# EAGLE board Small_robot_PCB_schematic (EAGLE 7.7.0)
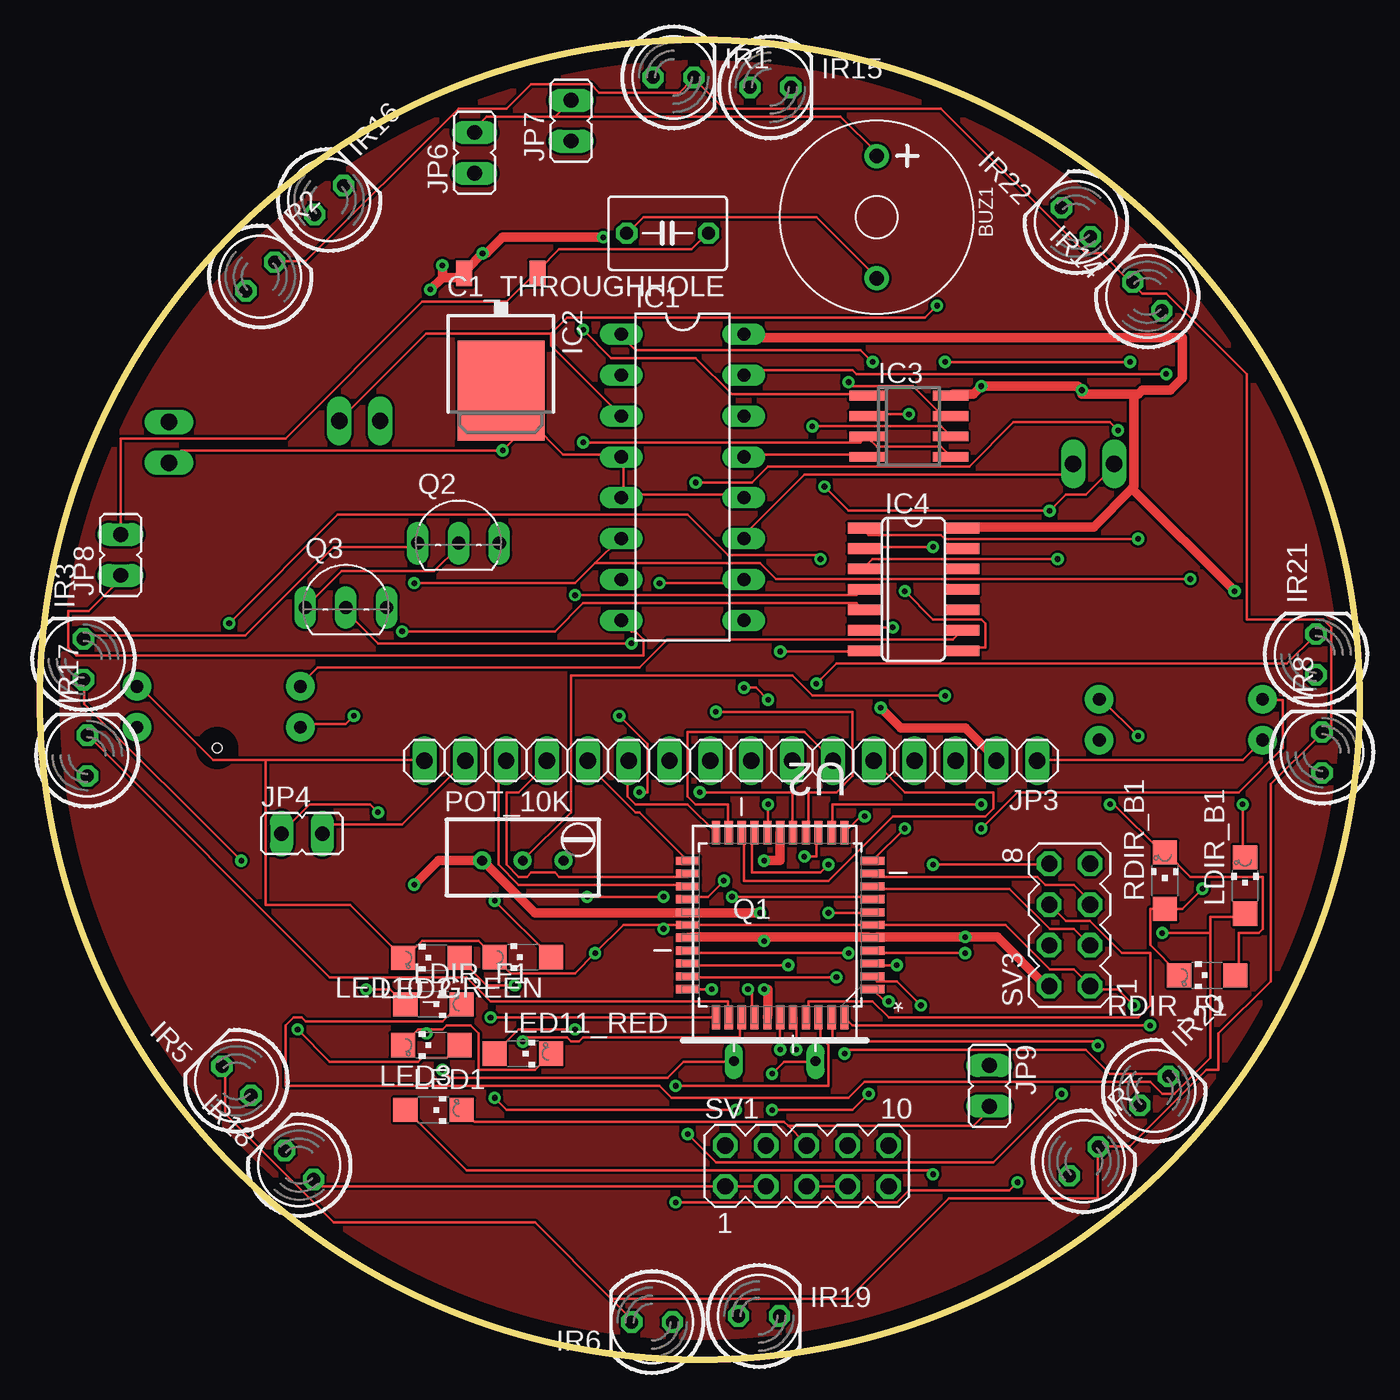
[diagram p0: board, top side]
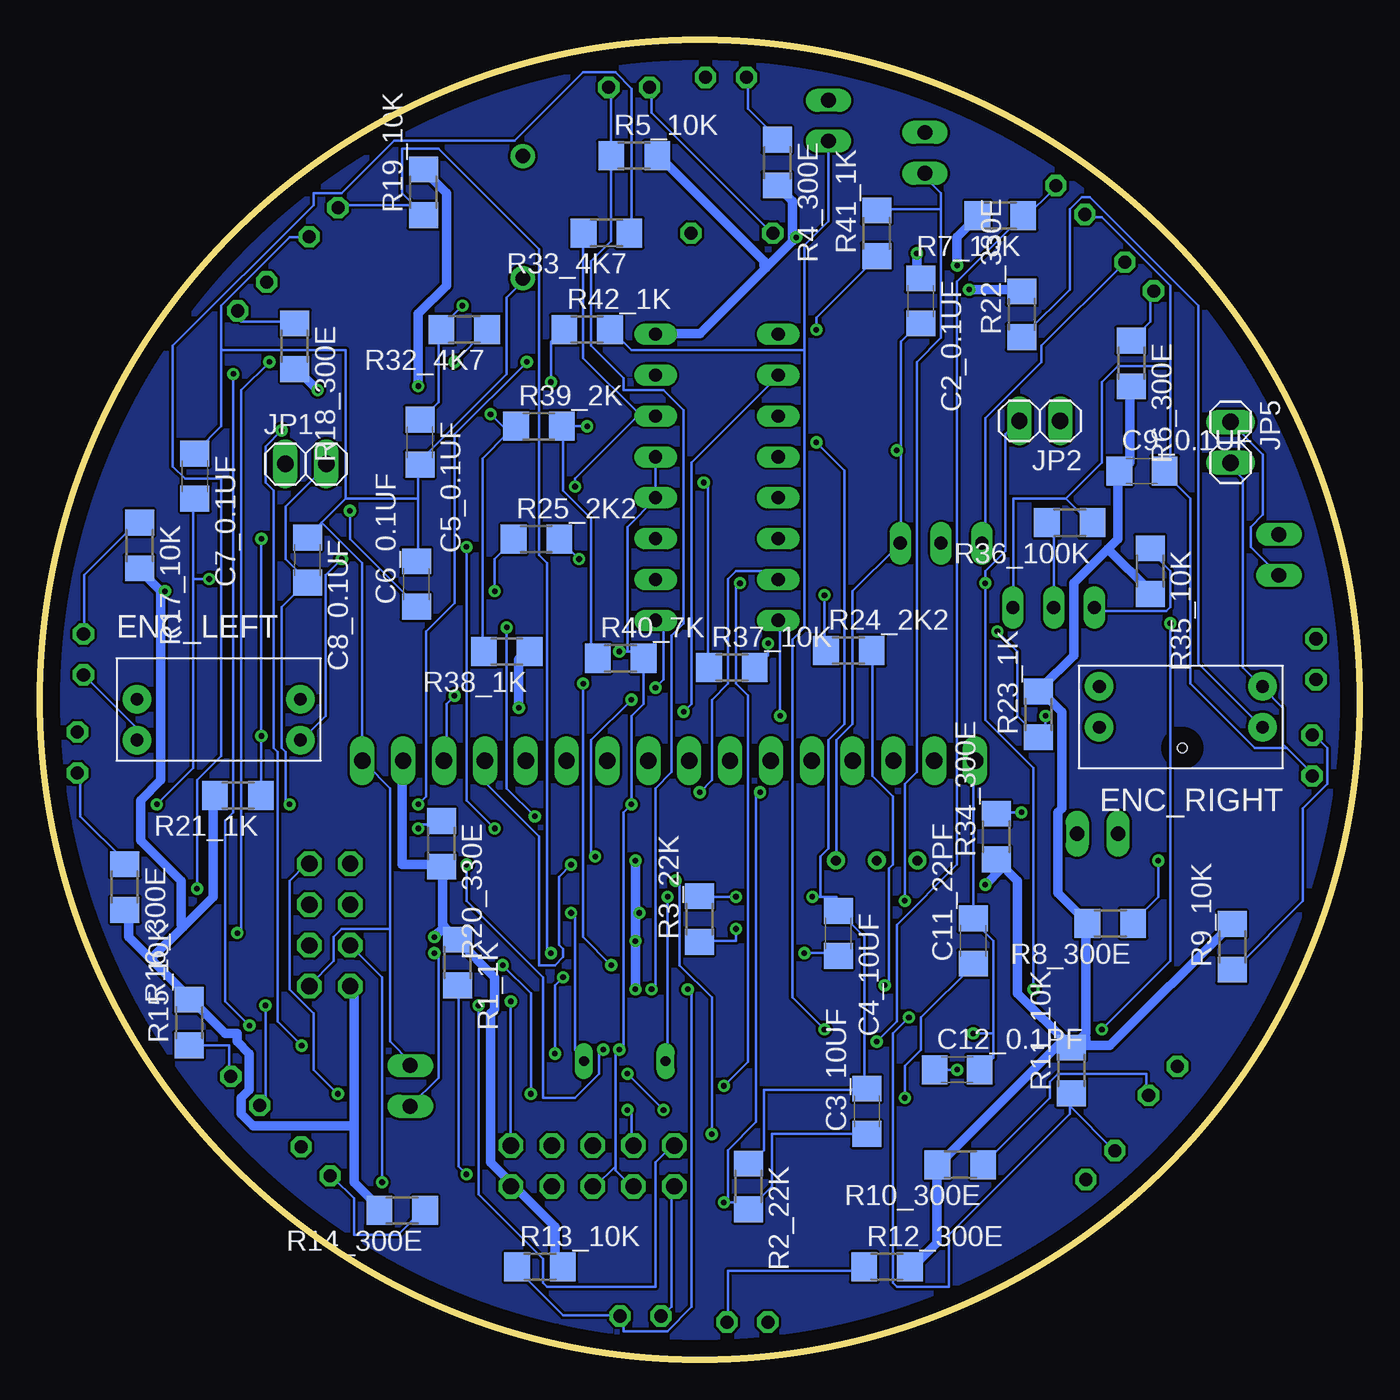
[diagram p1: board, bottom side, seen from below]

Size 82 x 82 mm. Coordinates in mm from the lower left corner, seen from the top.
Outline: circle at 41,41 radius 41
Copper layers (1*16): Top 0.035mm / dielectric 1.5mm / Bottom 0.035mm
Design rules "default *": minimum track width 6mil, minimum drill 0.35mm, track to track 6mil, track to pad 6mil, pad to pad 6mil, via to via 6mil, smd to smd 6mil, copper to edge 40mil, drill to drill 6mil, minimum pad ring 10mil, minimum via ring 8mil, stop-mask expansion 4mil, vias tented up to drill 0mil, thermal gap 10mil
Net classes: 1 vcc: width 0.584 mm
Holes 0.6 mm at 11,38

## Footprints (pad centres in the part's own frame; a part is rotated, then mirrored left to right if it is on the bottom)
BZ2-7.6-D12.0XH6.5MM = drill 0.9 pad 1.5: + -3.8,0; - 3.8,0
C050-045X075 = drill 0.813 octagon: 1 -2.54,0; 2 2.54,0
C1206 = smd 1.6 x 1.8: 1 -1.4,0; 2 1.4,0
THROUGH_HOLE_NORMAL = drill 0.8 pad 1.778: 1 -5.08,1.27; 2 -5.08,-1.27; 3 5.08,-1.27; 4 5.08,1.27
DIL16 = drill 0.813 long: 1 -8.89,-3.81; 2 -6.35,-3.81; 3 -3.81,-3.81; 4 -1.27,-3.81; 5 1.27,-3.81; 6 3.81,-3.81; 7 6.35,-3.81; 8 8.89,-3.81; 9 8.89,3.81; 10 6.35,3.81; 11 3.81,3.81; 12 1.27,3.81; 13 -1.27,3.81; 14 -3.81,3.81; 15 -6.35,3.81; 16 -8.89,3.81
TO252 = smd 1 x 1.6: 1 -2.28,-4.8; 2 2.28,-4.8 | smd 5.4 x 6.2: 3 0,2.5
SO08 = smd 0.6 x 2.2: 1 -1.905,-2.6; 2 -0.635,-2.6; 3 0.635,-2.6; 4 1.905,-2.6; 5 1.905,2.6; 6 0.635,2.6; 7 -0.635,2.6; 8 -1.905,2.6
SO14 = smd 0.66 x 2.032: 1 -3.81,-3.073; 2 -2.54,-3.073; 3 -1.27,-3.073; 4 0,-3.073; 5 1.27,-3.073; 6 2.54,-3.073; 7 3.81,-3.073; 8 3.81,3.073; 9 2.54,3.073; 10 1.27,3.073; 11 0,3.073; 12 -1.27,3.073; 13 -2.54,3.073; 14 -3.81,3.073
LED5MM = drill 0.813 octagon: A -1.27,0; K 1.27,0
1X02 = drill 1.016 long: 1 -1.27,0; 2 1.27,0
1X16 = drill 1.016 long: 1 -19.05,0; 2 -16.51,0; 3 -13.97,0; 4 -11.43,0; 5 -8.89,0; 6 -6.35,0; 7 -3.81,0; 8 -1.27,0; 9 1.27,0; 10 3.81,0; 11 6.35,0; 12 8.89,0; 13 11.43,0; 14 13.97,0; 15 16.51,0; 16 19.05,0
JP1 = drill 0.914 long: 1 0,-1.27; 2 0,1.27
CHIPLED_1206 = smd 1.5 x 1.5: A 0,-1.75; C 0,1.75
RTRIMT93YA = drill 0.61: 1 0,-2.54; 2 0,0; 3 0,2.54
Q = drill 0.61 long: 1 -2.54,-7.62; 2 2.54,-7.62
TO92-EBC = drill 0.813 long: B 0,-1.27; C -2.54,-1.27; E 2.54,-1.27
R1206 = smd 1.6 x 1.803: 1 -1.422,0; 2 1.422,0
MA05-2 = drill 1.016 octagon: 1 -5.08,-1.27; 2 -5.08,1.27; 3 -2.54,-1.27; 4 -2.54,1.27; 5 0,-1.27; 6 0,1.27; 7 2.54,-1.27; 8 2.54,1.27; 9 5.08,-1.27; 10 5.08,1.27
MA04-2 = drill 1.016 octagon: 1 -3.81,-1.27; 2 -3.81,1.27; 3 -1.27,-1.27; 4 -1.27,1.27; 5 1.27,-1.27; 6 1.27,1.27; 7 3.81,-1.27; 8 3.81,1.27
QFP80P1200X1200X120-44N = smd 1.473 x 0.508: 1 -5.74,3.988; 2 -5.74,3.2; 3 -5.74,2.388; 4 -5.74,1.6; 5 -5.74,0.787; 6 -5.74,0; 7 -5.74,-0.787; 8 -5.74,-1.6; 9 -5.74,-2.388; 10 -5.74,-3.2; 11 -5.74,-3.988; 23 5.74,-3.988; 24 5.74,-3.2; 25 5.74,-2.388; 26 5.74,-1.6; 27 5.74,-0.787; 28 5.74,0; 29 5.74,0.787; 30 5.74,1.6; 31 5.74,2.388; 32 5.74,3.2; 33 5.74,3.988 | smd 0.508 x 1.473: 12 -3.988,-5.74; 13 -3.2,-5.74; 14 -2.388,-5.74; 15 -1.6,-5.74; 16 -0.787,-5.74; 17 0,-5.74; 18 0.787,-5.74; 19 1.6,-5.74; 20 2.388,-5.74; 21 3.2,-5.74; 22 3.988,-5.74; 34 3.988,5.74; 35 3.2,5.74; 36 2.388,5.74; 37 1.6,5.74; 38 0.787,5.74; 39 0,5.74; 40 -0.787,5.74; 41 -1.6,5.74; 42 -2.388,5.74; 43 -3.2,5.74; 44 -3.988,5.74

## Placement (x,y rotation side)
BUZ1  KS-12065D03YA  [BZ2-7.6-D12.0XH6.5MM]  52,71 270 top
C1_THROUGHHOLE  1000uf  [C050-045X075]  39,70 180 top
C2_0.1UF  0.1uf  [C1206]  27.26,65.79 270 bottom
C3_10UF  10uf  [C1206]  30.61,15.42 90 bottom
C4_10UF  10uf  [C1206]  32.39,26.47 270 bottom
C5_0.1UF  0.1uf  [C1206]  58.39,57.02 270 bottom
C6_0.1UF  0.1uf  [C1206]  58.61,48.2 90 bottom
C7_0.1UF  .01uf  [C1206]  72.39,54.91 270 bottom
C8_0.1UF  0.1uf  [C1206]  65.39,49.69 270 bottom
C9_0.1UF  0.1uf  [C1206]  13.51,55.22 0 bottom
C11_22PF  22pf  [C1206]  24,26 90 bottom
C12_0.1PF  22pf  [C1206]  25,18 0 bottom
ENC_LEFT  MOC7811  [THROUGH_HOLE_NORMAL]  70.91,39.76 0 bottom
ENC_RIGHT  MOC7811  [THROUGH_HOLE_NORMAL]  11.09,40.56 180 bottom
IC1  L293D  [DIL16]  39.93,54.83 270 top
IC2  7805DT  [TO252]  28.64,62.71 180 top
IC3  LM358D  [SO08]  54,58 270 top
IC4  40106D  [SO14]  54.29,47.86 270 top
IR1  [LED5MM]  39.37,79.69 0 top
IR2  [LED5MM]  13.68,67.31 45 top
IR3  [LED5MM]  2.69,43.52 90 top
IR5  [LED5MM]  12.2,17.31 135 top
IR6  [LED5MM]  38.04,2.31 180 top
IR7  [LED5MM]  64.88,12.31 45 top
IR8  [LED5MM]  79.69,37.72 90 top
IR14  [LED5MM]  68.82,66.07 135 top
IR15  [LED5MM]  45.39,79.07 0 top
IR16  [LED5MM]  17.96,72.07 45 top
IR17  [LED5MM]  2.93,37.53 90 top
IR18  [LED5MM]  16.1,12.07 135 top
IR19  [LED5MM]  44.68,2.69 0 top
IR20  [LED5MM]  69.25,16.69 45 top
IR21  [LED5MM]  79.31,43.82 90 top
IR22  [LED5MM]  64.39,70.69 135 top
JP1  right_motor  [1X02]  65.49,55.66 0 bottom
JP2  left_motor  [1X02]  19.86,58.34 180 bottom
JP3  lcd port  [1X16]  42.93,37.22 180 top
JP4  lcd display  [JP1]  16.27,32.68 270 top
JP5  battery input  [1X02]  8,57 270 bottom
JP6  buzzer charged  [JP1]  27,75 0 top
JP7  buzzer discharged  [JP1]  33,77 0 top
JP8  battery switch  [JP1]  5,50 0 top
JP9  reset switch  [JP1]  59,17 180 top
LDIR_B1  blue  [CHIPLED_1206]  74.9,29.45 0 top
LDIR_F1  blue  [CHIPLED_1206]  24.45,22.07 270 top
LED1  white  [CHIPLED_1206]  24.45,15.5 270 top
LED2  yellow  [CHIPLED_1206]  24.31,24.96 90 top
LED3  yellow  [CHIPLED_1206]  24.31,19.53 90 top
LED10_GREEN  green  [CHIPLED_1206]  30,25 90 top
LED11_RED  red  [CHIPLED_1206]  30,19 270 top
POT_10K  10k  [RTRIMT93YA]  30,31 270 top
Q1  [Q]  45.66,26.16 0 top
Q2  BC548  [TO92-EBC]  26,52 0 top
Q3  BC548  [TO92-EBC]  19,48 0 top
R1_1K  1k  [R1206]  56.06,24.67 270 bottom
R2_22K  22k  [R1206]  37.98,10.74 270 bottom
R3_22K  22k  [R1206]  41.02,27.37 90 bottom
R4_300E  300E  [R1206]  36.18,74.39 270 bottom
R5_10K  10k  [R1206]  45.07,74.82 0 bottom
R6_300E  300E  [R1206]  14.18,61.91 270 bottom
R7_10K  10k  [R1206]  22.32,71.1 180 bottom
R8_300E  300E  [R1206]  15.48,27.1 180 bottom
R9_10K  10k  [R1206]  7.9,25.64 90 bottom
R10_300E  300E  [R1206]  24.8,12.1 180 bottom
R11_10K  10k  [R1206]  17.9,17.96 90 bottom
R12_300E  300E  [R1206]  29.36,5.74 0 bottom
R13_10K  10k  [R1206]  50.93,5.74 0 bottom
R14_300E  300E  [R1206]  59.5,9.26 180 bottom
R15_10K  10k  [R1206]  72.74,20.93 90 bottom
R16_300E  300E  [R1206]  76.74,29.36 270 bottom
R17_10K  10k  [R1206]  75.82,50.59 270 bottom
R18_300E  300E  [R1206]  66.18,62.98 270 bottom
R19_10K  10k  [R1206]  58.18,72.55 90 bottom
R20_330E  330E  [R1206]  57.06,32.05 270 bottom
R21_1K  1k  [R1206]  69.71,35.06 180 bottom
R22_330E  330E  [R1206]  20.98,64.96 90 bottom
R23_1K  1k  [R1206]  19.94,40.09 90 bottom
R24_2K2  2k2  [R1206]  31.74,44.06 0 bottom
R25_2K2  2k2  [R1206]  51.15,50.98 0 bottom
R32_4K7  4k7  [R1206]  55.64,64.02 180 bottom
R33_4K7  4k7  [R1206]  46.8,70.02 180 bottom
R34_300E  300E  [R1206]  22.57,32.49 90 bottom
R35_10K  10k  [R1206]  13,49 270 bottom
R36_100K  100k  [R1206]  18,52 180 bottom
R37_10K  10k  [R1206]  39,43 0 bottom
R38_1K  1k  [R1206]  53,44 180 bottom
R39_2K  2k  [R1206]  51,58 0 bottom
R40_7K  7k  [R1206]  45.92,43.58 0 bottom
R41_1K  1k  [R1206]  30,70 90 bottom
R42_1K  1k  [R1206]  48,64 0 bottom
RDIR_B1  blue  [CHIPLED_1206]  69.91,29.75 0 top
RDIR_F1  blue  [CHIPLED_1206]  72.55,23.87 90 top
SV1  isp programming  [MA05-2]  47.66,12.02 0 top
SV3  extender  [MA04-2]  64,27 90 top
U2  ATMEGA16-16AU  [QFP80P1200X1200X120-44N]  46,27 180 top

## Library data of the parts
BUZ1 = Seeed-OPL-Connector; MPN: KS-12065D03YA
C1_THROUGHHOLE C2_0.1UF C9_0.1UF C11_22PF C12_0.1PF POT_10K R1_1K R2_22K R3_22K R4_300E R5_10K R6_300E R7_10K R8_300E R9_10K R10_300E R11_10K R12_300E R13_10K R14_300E R15_10K R16_300E R17_10K R18_300E R19_10K R20_330E R21_1K R22_330E R23_1K R24_2K2 R25_2K2 R32_4K7 R33_4K7 R34_300E R35_10K R36_100K R37_10K R38_1K R39_2K R40_7K R41_1K R42_1K = resistor
C3_10UF C4_10UF C5_0.1UF C6_0.1UF C7_0.1UF C8_0.1UF = rcl
ENC_LEFT ENC_RIGHT = Motor encoder MOC7811
IC1 = st-microelectronics; MPN: L293D; OC_FARNELL: 9589619; OC_NEWARK: 56P8249
IC2 IC3 = linear
IC4 = 40xx
IR1-IR3 IR5-IR8 IR14-IR22 LDIR_B1 LDIR_F1 LED1-LED3 LED10_GREEN LED11_RED RDIR_B1 RDIR_F1 = led
JP1-JP3 JP5 = pinhead
JP4 JP6-JP9 = jumper
Q1 = special
Q2 Q3 = transistor-npn
SV1 SV3 = con-lstb; OC_FARNELL: unknown; OC_NEWARK: unknown
U2 = Atmel_By_element14_Batch_1-00; DESCRIPTION: 8-bit Microcontroller; MPN: ATMEGA16-16AU; OC_FARNELL: 9171134; OC_NEWARK: 96K6515; PACKAGE: QFP-44; SUPPLIER: Atmel

## Nets
3.5V: IC3.6 R39_2K.2 R40_7K.1
4.5V: IC3.2 R38_1K.2 R39_2K.1
ADC_VOL: C3_10UF.2 C4_10UF.1 IC3.3 IC3.5 R2_22K.1 R3_22K.2
D4: JP3.11 U2.22
D5: JP3.12 U2.23
D6: JP3.13 U2.24
D7: JP3.14 U2.25
DISCHARGED: IC3.7 R42_1K.1
EN: JP3.6 U2.21
EN_LEFT: IC4.2 U2.11
EN_RIGHT: IC4.6 U2.12
GND: BUZ1.- C1_THROUGHHOLE.2 C2_0.1UF.2 C4_10UF.2 C5_0.1UF.2 C6_0.1UF.2 C7_0.1UF.1 C8_0.1UF.1 C9_0.1UF.2 C11_22PF.2 C12_0.1PF.2 ENC_LEFT.2 ENC_RIGHT.2 IC1.4 IC1.5 IC1.12 IC1.13 IC2.3 IC3.4 IC4.7 IR15.A IR16.A IR17.A IR18.A IR19.A IR20.A IR21.A IR22.A JP3.1 JP3.16 JP5.2 JP9.1 LED2.C LED3.C LED10_GREEN.C LED11_RED.C POT_10K.3 Q2.E Q3.E R3_22K.1 R36_100K.1 R40_7K.2 SV1.1 SV1.3 SV1.5 SV1.7 SV3.1 U2.6 U2.18 U2.28 U2.39
IN1L: IC1.2 U2.15
IN1R: IC1.10 U2.42
IN2L: IC1.7 U2.16
IN2R: IC1.15 U2.44
IR1: IR15.K R5_10K.1 U2.37
IR2: IR16.K R7_10K.1 U2.36
IR3: IR17.K R9_10K.1 U2.35
IR4: IR18.K R11_10K.1 U2.34
IR5: IR19.K R13_10K.1 U2.33
IR6: IR20.K R15_10K.1 U2.32
IR7: IR21.K R17_10K.1 U2.31
IR8: IR22.K R19_10K.1 U2.30
IR_PROXIMITY: IR1.K IR2.K IR3.K IR5.K IR6.K IR7.K IR8.K IR14.K Q2.C
IR_SW: R37_10K.1 U2.43
MISO: SV1.2 U2.2
MOSI: SV1.10 U2.1
N: JP3.3 POT_10K.2
N$1: ENC_LEFT.1 R20_330E.1
N$2: C12_0.1PF.1 Q1.1 U2.8
N$3: C11_22PF.1 Q1.2 U2.7
N$4: IR1.A R4_300E.1
N$5: IR2.A R6_300E.1
N$6: IR3.A R8_300E.1
N$7: IR5.A R10_300E.1
N$8: LED1.A R1_1K.2
N$9: IR6.A R12_300E.1
N$10: IR7.A R14_300E.1
N$11: IR8.A R16_300E.1
N$12: IR14.A R18_300E.1
N$13: Q3.B R36_100K.2 R37_10K.2
N$14: C1_THROUGHHOLE.1 IC2.1 JP8.2
N$15: IC4.4 R24_2K2.1
N$16: LED2.A R24_2K2.2
N$17: IC4.8 R25_2K2.1
N$18: LED3.A R25_2K2.2
N$19: ENC_RIGHT.1 R22_330E.1
N$20: JP6.1 LED10_GREEN.A R41_1K.2
N$23: ENC_RIGHT.4 IC4.5 R23_1K.1
N$27: Q2.B Q3.C R35_10K.1
N$28: R33_4K7.1 RDIR_B1.A RDIR_F1.C
N$29: ENC_LEFT.4 IC4.1 R21_1K.1
N$30: ENC_LEFT.3 IC4.3
N$31: ENC_RIGHT.3 IC4.9
N$32: JP7.1 LED11_RED.A R42_1K.2
N$33: BUZ1.+ JP6.2 JP7.2
N$34: IC3.1 R41_1K.1
N$35: LDIR_B1.A LDIR_F1.C R32_4K7.1
N$39: JP3.15 JP4.2
N$49: JP4.1 R34_300E.2
OUT1L: C5_0.1UF.1 IC1.3 JP2.1 R32_4K7.2
OUT1R: C6_0.1UF.1 IC1.14 JP1.1 R33_4K7.2
OUT2L: C7_0.1UF.2 IC1.6 JP2.2 LDIR_B1.C LDIR_F1.A
OUT2R: C8_0.1UF.2 IC1.11 JP1.2 RDIR_B1.C RDIR_F1.A
PIN_26: SV3.7 U2.26
PIN_40: SV3.8 U2.40
PIN_41: SV3.6 U2.41
PWML: IC1.1 U2.13
PWMR: IC1.9 U2.14
RESET: JP9.2 LED1.C SV1.6 U2.4
RS: JP3.4 U2.19
RW: JP3.5 U2.20
RXD: SV3.3 U2.9
SCK: SV1.4 U2.3
TXD: SV3.5 U2.10
V_BATT: C3_10UF.1 IC1.8 JP5.1 JP8.1 R2_22K.2 SV3.4
VCC [vcc]: C2_0.1UF.1 C9_0.1UF.1 IC1.16 IC2.2 IC3.8 IC4.14 JP3.2 POT_10K.1 R1_1K.1 R4_300E.2 R5_10K.2 R6_300E.2 R7_10K.2 R8_300E.2 R9_10K.2 R10_300E.2 R11_10K.2 R12_300E.2 R13_10K.2 R14_300E.2 R15_10K.2 R16_300E.2 R17_10K.2 R18_300E.2 R19_10K.2 R20_330E.2 R21_1K.2 R22_330E.2 R23_1K.2 R34_300E.1 R35_10K.2 R38_1K.1 SV1.9 SV3.2 U2.5 U2.17 U2.27 U2.29 U2.38

## Tracks (layer width: path | path; a pad name or v marks a point on that pad's centre or on a via)
3.5V  (via drill 0.35)
  Top 0.152: v48,58 56,58 56.5,57.5 IC3.6
  Bottom 0.152: 49.5,58 49.5,54 47.75,52.25 47.75,44 47.5,43.75 R40_7K.1 | 49.5,58 v48,58 | 49.5,58 R39_2K.2
4.5V  (via drill 0.35)
  Top 0.152: v54,58.75 51.5,58.75 IC3.2
  Bottom 0.152: 53,57.5 52.5,58 R39_2K.1 53,57.5 | 53,57.5 54.5,56 54.5,44 R38_1K.2 | v54,58.75 53,57.75 53,57.5
ADC_VOL  (via drill 0.35)
  Top 0.152: IC3.5 56.5,56.25 56,56.75 52,56.75 51.5,57.25 IC3.3 51.25,57.25 51,57 v33.75,57 | v34,28.75 v38.75,28.75
  Bottom 0.152: R2_22K.1 37.75,12.25 37,13 37,16.75 30.75,16.75 C3_10UF.2 30.75,17 30.75,26.25 32.25,27.75 C4_10UF.1 32.5,28 32.5,28.75 33.5,28.75 | v38.75,28.75 41,28.75 R3_22K.2 | 33.5,28.75 v34,28.75 | v33.75,57 32,55.25 32,39.5 33,38.5 33,31.75 33.5,31.25 33.5,28.75
D4
  Top 0.152: U2.22 40.25,34.5 37,34.5 36.5,35 36.5,37 JP3.11
D5
  Top 0.152: U2.23 37.25,34 37,34 34,37 JP3.12
D6
  Top 0.152: U2.24 40.25,30 32.25,30 32,30.25 30.5,30.25 30.25,30 29.75,30 29,30.75 29,35.25 29.75,35.25 31.5,37 JP3.13
D7
  Top 0.152: U2.25 40.25,29.5 29.75,29.5 28.5,30.75 28.5,37 28.75,37 JP3.14
DISCHARGED  (via drill 0.35)
  Top 0.152: v50.25,60.75 50.5,60.5 54.25,60.5 56,58.75 56.5,58.75 IC3.7
  Bottom 0.152: v50.25,60.75 50.25,63.25 49.5,64 R42_1K.1
EN
  Top 0.152: JP3.6 47.5,39 40.25,39 40.25,35 40.75,34.5 42.75,34.5 42.75,32.75 U2.21
EN_LEFT  (via drill 0.35)
  Top 0.152: v53.75,33 U2.11 | v55.5,50.5 51.25,50.5 IC4.2
  Bottom 0.152: v53.75,33 55.5,34.75 v55.5,50.5
EN_RIGHT  (via drill 0.35)
  Top 0.152: v51.25,33.75 51,33.75 U2.12 | v53,45.5 51.25,45.5 IC4.6
  Bottom 0.152: v51.25,33.75 53,35.5 v53,45.5
GND  (via drill 0.35)
  Top 0.152: 24,20.5 25,20.5 25.25,20.75 26.75,20.75 27.25,20.25 27.25,18 30.75,18 LED11_RED.C | 24,20.5 23.5,20.5 22.75,19.75 LED3.C | v24,20.25 24,20.5 | 14,37.25 23.75,37.25 JP3.16 | 14,37.25 10.75,37.25 6.25,41.75 ENC_RIGHT.2 | v46,19.25 U2.39 | SV1.5 SV1.7 | IR18.A 17,11 17.25,10.75 SV1.1 SV1.3 | v45.25,34.5 45.25,32.75 U2.18 | v46,44 51,44 IC4.7 | 36.25,53.75 36.25,56 IC1.4 36,56.25 32.5,56.25 30.5,58.25 | IC3.4 51.25,56.25 43.75,56.25 IC1.13 | 36.25,53.75 43.5,53.75 IC1.12 | 36.25,53.75 IC1.5 | 30.5,58.25 28.75,60 IC2.3 30.5,58.25 | 30.5,58.25 v28.75,56.5 8.75,56.5 8,55.75 JP5.2 | C1_THROUGHHOLE.2 36.5,70 37.5,71 48.25,71 52,67.25 BUZ1.- | 38.75,27 U2.28 U2.6 60,27 62.75,24.25 64.25,24.25 65.25,23.25 SV3.1 65.5,23 67,23 v68,22 | 38.75,27 36.25,27 v34.5,25.25 33.25,24 29.25,24 LED10_GREEN.C 27.25,26 23.75,26 22.75,25 LED2.C 22.5,25 19.25,28.25 14,28.25 14,37.25 | 38.75,27 v38.75,26.75 | ENC_LEFT.2 74.75,37.25 62,37.25 JP3.1
  Bottom 0.152: 18.25,53.5 16.75,52 R36_100K.1 | 18.25,53.5 21.5,53.5 21.5,46.75 Q3.E | 11.75,61.75 11.75,66.75 16,71 17,71 IR16.A | 11.75,61.75 11.75,55.5 12,55.25 C9_0.1UF.2 12,55 10.5,53.5 10.5,42 6.5,38 4.5,38 | 18.25,53.5 16,55.75 16,60.75 15,61.75 11.75,61.75 | 4.5,38 4.75,38.25 4.75,40.5 6,41.75 ENC_RIGHT.2 6.25,42 7.25,43 7.25,54.75 8,55.5 JP5.2 | 4.5,38 3,36.5 IR17.A | 22.75,20.25 22.75,26 24,27.25 C11_22PF.2 24,37 JP3.16 | 22.75,20.25 22.75,18.75 23.5,18 C12_0.1PF.2 | 22.75,20.25 v24,20.25 | 46.25,12 46.25,11.75 45.25,10.75 SV1.3 | 46.25,12 46.25,19 v46,19.25 45.75,19.5 45.75,34 v45.25,34.5 45.25,40 44.5,40.75 44.5,43.5 R40_7K.2 44.5,43.75 44.5,44 45.5,44 | 46.25,12 47.5,10.75 SV1.5 | IR19.A 43.25,2.75 42.75,3.25 42.75,10.75 SV1.1 | 28.5,56.5 28.5,50.75 Q2.E 28.75,50.5 31.5,47.75 31.5,39.5 32.5,38.5 32.5,31 POT_10K.3 | 28.5,56.5 28.5,63.25 27.5,64.25 C2_0.1UF.2 | 45.5,44 v46,44 | IC1.13 43.75,56 43.75,53.75 IC1.12 43.75,53.5 45.5,51.75 45.5,44 | v28.75,56.5 28.5,56.5 | 70.75,62.75 70.75,65.5 66.5,69.75 65.5,69.75 IR22.A | 70.75,62.75 70.75,58 72.25,56.5 C7_0.1UF.1 | C1_THROUGHHOLE.2 36.5,70 44,77.5 44,79 IR15.A | 58.5,53.5 58.5,49.75 C6_0.1UF.2 | 58.5,53.5 58.5,55.5 C5_0.1UF.2 58.25,55.75 58.25,56 53,61.25 53,66 52,67 BUZ1.- | 63,53.5 64.5,52 | 64.5,52 65.25,51.25 C8_0.1UF.1 | 58.5,53.5 63,53.5 | 70.75,62.75 63,62.75 63,53.5 | v34.5,25.25 32.5,25.25 C4_10UF.2 | v38.75,26.75 38.75,26 41,26 R3_22K.1 | v68,22 68,16.25 68.25,16 IR20.A | IR21.A 79.25,42.5 76,39.25 ENC_LEFT.2 | 60.25,26.75 60.25,35.5 61.75,37 JP3.1 62,37.25 62,49.5 64.5,52 | 60.25,26.75 60.25,19.75 59,18.5 JP9.1 | 60.25,26.75 63.25,26.75 63.75,26.25 63.75,24.75 65.25,23.25 SV3.1
IN1L  (via drill 0.35)
  Top 0.152: v42,40.25 50.5,40.25 50.5,36.25 49.5,35.25 47.75,35.25 47.75,32.75 U2.15
  Bottom 0.152: v42,40.25 41.5,40.75 41.5,55.75 36.25,61 IC1.2
IN1R  (via drill 0.35)
  Top 0.152: v39.5,17 49,17 49,19.5 48.5,20 48.5,21.25 U2.42 | v38.5,48.25 43.5,48.25 IC1.10
  Bottom 0.152: v39.5,17 38,18.5 38,41.25 38.75,42 38.75,48 v38.5,48.25
IN2L  (via drill 0.35)
  Top 0.152: v41,35.25 46.75,35.25 46.75,32.75 U2.16
  Bottom 0.152: v41,35.25 40.25,36 40.25,41 39.25,42 39.25,48.5 38.75,49 36.25,49 36.25,48.5 IC1.7
IN2R  (via drill 0.35)
  Top 0.152: v69,20.75 50.5,20.75 U2.44 | v70,61.25 50.75,61.25 50.5,61.5 44,61.5 43.75,61.25 IC1.15
  Bottom 0.152: v69,20.75 70.5,22.25 70.5,33.5 70,34 v70,61.25
IR1  (via drill 0.35)
  Top 0.152: v44,23 44.25,23 44.25,21.5 U2.37
  Bottom 0.152: v44,23 43.75,23.25 43.75,35.5 42.75,36.5 42.75,45 42,45.75 42,59 43.25,60.25 45.75,60.25 45.75,61 47.75,63 47.75,68.25 46.5,69.5 46.5,74.75 R5_10K.1 46.5,75 46.5,79 IR15.K
IR2  (via drill 0.35)
  Top 0.152: v30,19.75 30.25,20 32.75,20 33,19.75 33.5,19.75 33.75,20 43.5,20 43.5,21.25 U2.36
  Bottom 0.152: v30,19.75 28.75,21 28.75,27 25,30.75 25,67 21,71 R7_10K.1 20.75,71 19,72.75 IR16.K
IR3
  Top 0.152: U2.35 42.75,21.5 42.75,22.25 28,22.25 26.5,23.75 18,23.75 3,38.75 IR17.K
  Bottom 0.152: R9_10K.1 7.75,24.25 3.5,28.5 3.5,34.25 2,35.75 2,38 2.75,38.75 IR17.K
IR4  (via drill 0.35)
  Top 0.152: v28,21.25 U2.34
  Bottom 0.152: v28,21.25 29,20.25 29,4.75 28.75,4.5 25.5,4.5 25.5,7.75 18,15.25 18,15.75 | 18,15.75 18,16.5 R11_10K.1 18,15.75 | 18,15.75 15.25,13 IR18.K
IR5  (via drill 0.35)
  Top 0.152: v41.75,23 40.5,23 U2.33
  Bottom 0.152: v41.75,23 41.5,22.75 41.5,3.25 43,1.75 45.75,1.75 45.75,2.5 IR19.K 46,2.75 49.5,2.75 52.25,5.5 R13_10K.1
IR6  (via drill 0.35)
  Top 0.152: v49.5,23.75 40.5,23.75 U2.32 | v50,19 50.25,19.25 65,19.25 66.5,17.75 70,17.75 IR20.K
  Bottom 0.152: v49.5,23.75 50,23.25 v50,19 | R15_10K.1 72.5,19.5 70.25,19.5 70.25,17.75 IR20.K
IR7  (via drill 0.35)
  Top 0.152: v46.5,24.5 40.5,24.5 U2.31 | v48.25,42 49.5,43.25 77.5,43.25 79.25,45 IR21.K
  Bottom 0.152: v46.5,24.5 48.25,26.25 v48.25,42 | R17_10K.1 76,52 79.25,48.75 79.25,45.25 IR21.K
IR8  (via drill 0.35)
  Top 0.152: v50.25,25.25 40.5,25.25 U2.30
  Bottom 0.152: v50.25,25.25 50.5,25.5 50.5,49.5 51,50 51,69 57.25,75.25 59.5,75.25 59.5,72.5 58.75,71.75 | 58.75,71.75 58.25,71.25 R19_10K.1 58.75,71.75 | 58.75,71.75 63.25,71.75 IR22.K
IR_PROXIMITY
  Top 0.152: IR3.K 2.75,45 12.75,45 18.25,50.5 23.25,50.5 Q2.C | IR2.K 14.75,68.25 16.5,68.25 26,77.75 29,77.75 30.5,79.25 34.25,79.25 34.75,78.75 39.75,78.75 40.5,79.5 IR1.K 40.75,79.5 42.5,77.75 56,77.75 65,68.75 66,68.75 67.75,67 IR14.K 68,66.75 68.5,66.25 70,66.25 75,61.25 75,46 79.75,46 80.25,45.5 80.25,39 79.75,39 IR8.K 79.5,38.75 76.5,35.75 76.5,23.5 73.25,20.25 73.25,18 72.5,18 67.75,13.25 66,13.25 IR7.K 65.75,13 65.75,10 56.5,10 50.25,3.75 35.5,3.75 | 35.5,3.75 30.75,8.5 18.25,8.5 11.5,15.25 11.5,18 IR5.K | 35.5,3.75 36.75,2.5 IR6.K
  Bottom 0.152: IR2.K 14.75,68 19.75,63 19.75,62 23.25,58.5 23.25,50.75 Q2.C
IR_SW  (via drill 0.35)
  Top 0.152: v65.75,19.5 65.5,19.75 49.25,19.75 49.25,21.25 U2.43 | v67,57.75 66.5,58.25 60.5,58.25 57.75,55.5 45.25,55.5 44.25,54.5 v40.75,54.5
  Bottom 0.152: v65.75,19.5 67.25,21 67.25,37.75 67.5,38 67.5,54 68,54.5 68,56.75 v67,57.75 | v40.75,54.5 40.5,54.25 40.5,43 R37_10K.1
MISO  (via drill 0.35)
  Top 0.152: v54.75,22 53.25,23.5 52,23.5 51.75,23.75 U2.2
  Bottom 0.152: v54.75,22 54.75,10.25 50.75,6.25 50.75,4.75 50.5,4.5 43.75,4.5 43.75,12.25 42.75,13.25 SV1.2
MOSI  (via drill 0.35)
  Top 0.152: v52.75,22.25 52.5,22.25 U2.1
  Bottom 0.152: v52.75,22.25 52.75,13.5 SV1.10
N  (via drill 0.35)
  Top 0.152: POT_10K.2 33,34 33,42.5 46.75,42.5 48,41.25 v56.25,41.25
  Bottom 0.152: v56.25,41.25 56.75,40.75 56.75,37.25 JP3.3
N$1  (via drill 0.35)
  Top 0.152: v58.5,33 60.75,35.25 74.5,35.25 77.25,38 77.25,41 76,41 ENC_LEFT.1
  Bottom 0.152: v58.5,33 58.5,33.25 57.25,33.25 R20_330E.1
N$2  (via drill 0.35)
  Top 0.152: v43,28.75 51.5,28.75 U2.8 | v25,18 25.5,17.5 39,17.5 40,18.5 43,18.5 Q1.1
  Bottom 0.152: v43,28.75 43,18.75 Q1.1 | v25,18 C12_0.1PF.1
N$3  (via drill 0.35)
  Top 0.152: v49,27.75 51.5,27.75 U2.7 | v28.25,16.25 29,15.5 v43.25,15.5 | v45.5,17.75 46.25,18.5 48,18.5 Q1.2
  Bottom 0.152: v49,27.75 48.75,27.5 48.75,19.25 48.25,18.75 Q1.2 | v28.25,16.25 28.25,18.25 27.25,19.25 27.25,21.25 24,24.5 C11_22PF.1 | v45.5,17.75 v43.25,15.5
N$4
  Bottom 0.152: R4_300E.1 36.25,76 38,77.75 38,79.5 IR1.A
N$5
  Bottom 0.152: R6_300E.1 14,63.5 13,64.5 13,66.25 IR2.A
N$6  (via drill 0.35)
  Top 0.152: v12.5,31 2.75,40.75 2.75,42.25 IR3.A
  Bottom 0.152: v12.5,31 12.5,28.75 14,27.25 R8_300E.1
N$7
  Bottom 0.152: R10_300E.1 23.25,12.25 19.25,16.25 19.25,17.25 18.75,17.75 13.25,17.75 13.25,16.5 IR5.A
N$8  (via drill 0.35)
  Top 0.152: v55.5,11.5 55.25,11.75 26.5,11.75 22.75,15.5 LED1.A
  Bottom 0.152: v55.5,11.5 56,12 56,23 R1_1K.2
N$9
  Bottom 0.152: R12_300E.1 31,5.5 39.25,5.5 39.25,2.5 IR6.A
N$10
  Bottom 0.152: R14_300E.1 58.25,9.25 59.75,7.75 62.5,7.75 62.5,10 63.75,11.25 IR7.A
N$11
  Bottom 0.152: R16_300E.1 76.75,31 79.5,33.75 79.5,36.25 IR8.A
N$12
  Bottom 0.152: R18_300E.1 66.25,64.5 69.5,64.5 69.5,65 IR14.A
N$13  (via drill 0.35)
  Top 0.152: v36.75,44.5 21,44.5 19,46.5 Q3.B
  Bottom 0.152: Q3.B 19,51.75 19.25,52 R36_100K.2 | v36.75,44.5 36.75,43.75 37.5,43 R37_10K.2
N$14
  Top 0.152: C1_THROUGHHOLE.1 41.5,70 40.5,69 32.25,69 31,67.75 IC2.1 30.75,67.5 29,65.75 23.75,65.75 15.25,57.25 5,57.25 JP8.2
N$15  (via drill 0.35)
  Top 0.152: v33.25,47.5 50.75,47.5 51,47.75 IC4.4
  Bottom 0.152: v33.25,47.5 33.25,44.25 R24_2K2.1
N$16  (via drill 0.35)
  Top 0.152: v29.5,23.25 27.75,23.25 26.25,24.75 LED2.A
  Bottom 0.152: v29.5,23.25 29.25,23.5 29.25,30.5 29,30.75 29,35 30.25,36.25 30.25,44 R24_2K2.2
N$17  (via drill 0.35)
  Top 0.152: v53.75,47.75 55.5,46 58.5,46 58.75,45.75 58.75,44.25 57.5,44.25 IC4.8
  Bottom 0.152: v53.75,47.75 53.75,49.75 52.75,50.75 R25_2K2.1
N$18  (via drill 0.35)
  Top 0.152: v16,20.5 18,18.5 23.5,18.5 23.75,18.75 25.25,18.75 26,19.5 LED3.A | v11.75,45.75 18.5,52.5 40.25,52.5 42.75,50 48.25,50 v48.5,49.75
  Bottom 0.152: v16,20.5 11.75,24.75 v11.75,45.75 | v48.5,49.75 49.5,50.75 R25_2K2.2
N$19
  Bottom 0.152: R22_330E.1 20.75,63.75 18,66.5 18,71.5 17.25,72.25 16.75,72.25 10,65.5 10,43.25 6.25,39.5 ENC_RIGHT.1
N$20  (via drill 0.35)
  Top 0.152: v28.25,28.5 LED10_GREEN.A
  Bottom 0.152: v28.25,28.5 28.25,35.75 27.5,36.5 27.5,62 26,63.5 26,71.5 | 26,71.5 26,72.5 27,73.5 JP6.1 | 26,71.5 30,71.5 R41_1K.2
N$21
  pour Bottom: 39,82 arc-180 42,0 arc-180
  pour Top: 39,82 arc-180 42,0 arc-180
N$23  (via drill 0.35)
  Top 0.152: v19.5,40 19,39.5 16.25,39.5 ENC_RIGHT.4 | v22.5,45.25 32,45.25 33.75,47 50.75,47 51,46.75 IC4.5
  Bottom 0.152: v19.5,40 19.5,39 19.75,38.75 R23_1K.1 20,38.75 21.25,40 21.25,44 v22.5,45.25
N$27
  Top 0.152: Q2.B 26,50.5 24.5,49 18.75,49 16.5,46.75 Q3.C
  Bottom 0.152: R35_10K.1 13,50.25 11.75,49 11.75,46.75 12,46.5 16.25,46.5 Q3.C
N$28  (via drill 0.35)
  Top 0.152: RDIR_F1.C 70.75,24 69,25.75 69,28 RDIR_B1.A 71,28 v72.25,29.25
  Bottom 0.152: v72.25,29.25 72.25,36 70.75,37.5 70.75,54.75 73,54.75 73.75,55.5 73.75,63 65,71.75 65,72.5 63.25,72.5 60,75.75 52.5,75.75 48.25,80 46.25,80 45.25,79 45.25,70.25 R33_4K7.1
N$29  (via drill 0.35)
  Top 0.152: v68.25,38.75 66,41 ENC_LEFT.4 | v68.25,51 56.25,51 56,51.25 51.5,51.25 51.25,51.5 IC4.1
  Bottom 0.152: R21_1K.1 68.25,35.25 v68.25,38.75 v68.25,51
N$30  (via drill 0.35)
  Top 0.152: v63.25,49.75 51.75,49.75 51.25,49.25 IC4.3
  Bottom 0.152: v63.25,49.75 64.25,48.75 64.25,40 65.75,38.5 ENC_LEFT.3
N$31
  Top 0.152: IC4.9 57.25,45.25 56.75,44.75 39,44.75 37.25,43 17.25,43 16.25,42 ENC_RIGHT.3
N$32  (via drill 0.35)
  Top 0.152: LED11_RED.A 29.75,20.5 v33.25,20.5
  Bottom 0.152: v33.25,20.5 35.25,22.5 35.25,44.75 34.5,45.5 34.5,62.75 | 34.5,62.75 34.5,69.25 33,70.75 JP7.1 | 34.5,62.75 45.25,62.75 46.5,64 R42_1K.2
N$33
  Top 0.152: 32,77.25 27.75,77.25 27,76.5 JP6.2 | 32,77.25 33,78.25 JP7.2 | 32,77.25 49.75,77.25 52,75 BUZ1.+
N$34  (via drill 0.35)
  Top 0.152: v33.75,64 35.5,62.25 40.75,62.25 43,60 51.25,60 IC3.1
  Bottom 0.152: v33.75,64 33.75,64.75 30,68.5 R41_1K.1
N$35  (via drill 0.35)
  Top 0.152: 72.75,26.5 72.75,27.5 74.75,27.5 LDIR_B1.A | 72.75,26.5 72.75,18.75 70.5,16.5 69.75,16.5 69,17.25 51.25,17.25 50.25,16.25 39.25,16.25 38.5,17 15.25,17 15.25,20.75 15.75,21.25 16.25,21.25 16.5,21 25,21 26,22 LDIR_F1.C | v67.75,62 v56.25,62 | 72.75,26.5 v69.75,26.5
  Bottom 0.152: v56.25,62 54.25,64 R32_4K7.1 | v67.75,62 69.5,60.25 69.5,26.75 v69.75,26.5
N$39
  Top 0.152: JP4.2 17.75,32.75 18.25,33.25 22.5,33.25 26.25,37 JP3.15
N$49  (via drill 0.35)
  Top 0.152: v21,34 20.5,34.5 16.75,34.5 15,32.75 JP4.1
  Bottom 0.152: v21,34 22.5,34 R34_300E.2
OUT1L  (via drill 0.35)
  Top 0.152: 31.75,63.75 31.75,63 36,58.75 IC1.3 | 31.75,63.75 24,63.75 JP2.1 | v55.75,65.5 55,64.75 32.75,64.75 31.75,63.75
  Bottom 0.152: C5_0.1UF.1 58.25,58.5 57.25,59.5 57.25,64 R32_4K7.2 57,64.25 v55.75,65.5
OUT1R  (via drill 0.35)
  Top 0.152: JP1.1 66.75,55.5 65,53.75 63.75,53.75 v62.75,52.75 50.25,52.75 v48.75,54.25
  Bottom 0.152: 44.75,58.75 48.25,62.25 48.25,70 R33_4K7.2 | 44.75,58.75 43.75,58.75 IC1.14 44.75,58.75 | v62.75,52.75 62.75,51 58.75,47 C6_0.1UF.1 | 44.75,58.75 48.75,54.75 v48.75,54.25
OUT2L  (via drill 0.35)
  Top 0.152: v74.75,34.5 74.75,31.25 LDIR_B1.C | v20.25,23 21.75,23 22.5,22.25 LDIR_F1.A | 34.5,49.5 33.25,48.25 v23.25,48.25 | 34.5,49.5 36,51 IC1.6 | v71.5,48.5 45.75,48.5 44.75,49.5 34.5,49.5
  Bottom 0.152: v74.75,34.5 72.5,36.75 72.5,48.5 | 72.5,48.5 72.5,53.5 C7_0.1UF.2 | v20.25,23 20.25,36.75 23.25,39.75 v23.25,48.25 23.25,49 22,50.25 22,57.5 21.25,58.25 JP2.2 | v71.5,48.5 72.5,48.5
OUT2R  (via drill 0.35)
  Top 0.152: RDIR_F1.A 74.5,24 74.5,26.5 75.75,26.5 76,26.75 76,30 71.5,30 70,31.5 RDIR_B1.C 69.75,31.5 66.75,34.5 v66.5,34.5 | IC1.11 43.75,51.25 47.5,55 63.5,55 64,55.5 JP1.2
  Bottom 0.152: JP1.2 64.25,55.5 66.75,53 66.75,49.75 65.5,48.5 C8_0.1UF.2 65.5,48.25 67,46.75 67,38 66.75,37.75 66.75,34.75 v66.5,34.5
PIN_26  (via drill 0.35)
  Top 0.152: v42.5,29.75 41.5,28.75 40.5,28.75 U2.26 | v40.25,14 42,12.25 59.25,12.25 v63.5,16.5
  Bottom 0.152: v42.5,29.75 42.25,29.5 42.25,24.5 40.25,22.5 v40.25,14 | v63.5,16.5 65,18 65,21.5 66.5,23 66.5,29.75 65.5,30.75 SV3.7
PIN_40  (via drill 0.35)
  Top 0.152: v47,19.25 47,21.25 U2.40 | v55.5,30.75 62.5,30.75 SV3.8
  Bottom 0.152: v47,19.25 47.25,19 47.25,17.75 48.75,16.25 50.75,16.25 50.75,23.75 55.5,28.5 v55.5,30.75
PIN_41
  Top 0.152: SV3.6 63.75,27.25 65.25,27.25 67.25,25.25 69,25.25 69,22 68.25,21.25 52.75,21.25 51.75,22.25 47.75,22.25 47.75,21.5 U2.41
PWML  (via drill 0.35)
  Top 0.152: v58.5,34.5 49.25,34.5 49.25,32.75 U2.13 | v51.75,62 51,62.75 37,62.75 36.25,63.5 IC1.1
  Bottom 0.152: v58.5,34.5 58,35 58,45.25 56.25,47 56.25,57.5 v51.75,62
PWMR  (via drill 0.35)
  Top 0.152: v47.5,31.25 48.25,31.25 48.25,32.5 U2.14 | v45.25,41 44.5,41.75 v43.75,41.75
  Bottom 0.152: v47.5,31.25 47.75,31.5 47.75,38.5 v45.25,41 | v43.75,41.75 43.25,42.25 43.25,45.5 43.5,45.75 IC1.9
RESET  (via drill 0.35)
  Top 0.152: v57.5,25.25 51.75,25.25 U2.4 | 46.5,14.5 47.5,13.5 SV1.6 | 46.5,14.5 46.25,14.75 27,14.75 26.25,15.5 LED1.C | 46.5,14.5 58,14.5 59,15.5 JP9.2
  Bottom 0.152: v57.5,25.25 57.25,25 57.25,17.5 59,15.75 JP9.2
RS  (via drill 0.35)
  Top 0.152: v49,30.75 48.5,30.25 44.25,30.25 44.25,32.5 U2.19
  Bottom 0.152: v49,30.75 49.75,30 49.75,25.75 49.5,25.5 49.5,25 50,24.5 51,24.5 51,32.5 54.25,35.75 54.25,37 JP3.4
RW
  Top 0.152: U2.20 43.75,32.5 43.75,29.75 49,29.75 53,33.75 58.75,33.75 59.25,34.25 59.25,35.25 53.75,35.25 52,37 JP3.5
RXD
  Top 0.152: SV3.3 64.25,26.75 62.75,26.75 60.25,29.25 51.75,29.25 U2.9
SCK  (via drill 0.35)
  Top 0.152: v53.25,24.5 51.75,24.5 U2.3 | v51.5,16.5 50.5,15.5 v45.5,15.5
  Bottom 0.152: v53.25,24.5 51.5,22.75 v51.5,16.5 | v45.5,15.5 45.25,15.25 45.25,13.5 SV1.4
TXD
  Top 0.152: U2.10 51.75,30 62,30 62.5,29.5 64.25,29.5 65.25,28.5 SV3.5
V_BATT  (via drill 0.35)
  Top 0.152: IC1.8 36.25,45.75 36.75,45.25 37,45.25 37.5,44.75 37.5,43.75 2.25,43.75 1.75,44.25 1.75,46.5 3,46.5 5,48.5 JP8.1 | v60.75,11 60.25,10.5 54,10.5 53.25,9.75 v39.5,9.75 | v36,40 37.75,38.25 37.75,35.25 v37.25,35.25
  Bottom 0.152: JP5.1 8,58.25 6,56.25 6,52.5 6.75,51.75 6.75,50.5 5,48.75 JP8.1 | C3_10UF.1 30.75,14 36.5,14 36.5,10.75 37.75,9.5 R2_22K.2 38,9.5 38,9.75 39.25,9.75 | SV3.4 60.75,23.75 v60.75,11 | v36,40 36,45.75 IC1.8 | v37.25,35.25 37.5,35 37.5,14.75 39.25,13 39.25,9.75 | 39.25,9.75 v39.5,9.75
VCC  (via drill 0.35)
  Top 0.584: IC3.8 56.75,60 58,60 v58.5,60.5 64.5,60.5 v64.75,60.25 64.75,60 68,60 | 67.88,54.12 68,54.25 68,60 | 67.88,54.12 65.5,51.75 57.5,51.75 IC4.14 | 25,67.25 v24.25,66.5 | 25,67.25 26.25,67.25 IC2.2 26.5,67.75 v27.5,68.75 27.75,68.75 28.75,69.75 v35,69.75 | 25,67.25 v25,68 | 68,60 68.25,60 68.5,60.25 70.25,60.25 71,61 71,63.5 43.75,63.5 IC1.16 | v52.25,40.5 53.5,39.25 57.5,39.25 59.5,37.25 JP3.2 | 45,26.25 51.5,26.25 U2.5 52,26.25 v57.5,26.25 59.5,26.25 62.5,23.25 SV3.2 | 45,26.25 40.5,26.25 U2.29 | v45,23 45.25,23 45.25,21.5 U2.38 | v45,26 45,26.25 | U2.17 46,31 v45,31 | v44.75,27.75 40.5,27.75 U2.27 40.25,27.75 30.75,27.75 27.5,31 POT_10K.1 24.75,31 v23.25,29.5 | v74.25,47.75 67.88,54.12
  Bottom 0.584: R6_300E.2 14.25,60.25 14.25,55.75 14.75,55.25 C9_0.1UF.1 15,55 15,51 15.62,50.38 | 15.62,50.38 17.75,48.25 17.75,43.75 19.75,41.75 R23_1K.2 19.75,41.5 18.5,40.25 18.5,34.25 18.75,34 18.75,29 17,27.25 R8_300E.2 17,27 17,20.25 17.75,19.5 R11_10K.2 | 15.62,50.38 13,47.75 R35_10K.2 | R12_300E.2 27.75,5.75 26.25,7.25 26.25,12 R10_300E.2 26,12.25 18.5,19.75 R11_10K.2 | R9_10K.2 8,27 15.5,19.5 17,19.5 17,20 R11_10K.2 | R11_10K.2 18,19.5 21.25,22.75 21.25,29.75 22.5,31 R34_300E.1 22.25,30.5 v23.25,29.5 | v58.5,60.5 58.5,65 56.75,66.75 56.75,72.5 58,73.75 R19_10K.2 | v64.75,60.25 66,61.5 R18_300E.2 | v27.5,68.75 27.5,67.25 C2_0.1UF.1 | v24.25,66.5 21,66.5 R22_330E.2 | v25,68 25,69.75 23.75,71 R7_10K.2 | 35.25,69.75 35.25,69.5 36.88,67.88 | 35.25,69.75 35.25,72 36,72.75 R4_300E.2 | 36.88,67.88 41,63.75 43.5,63.75 IC1.16 | R5_10K.2 43.5,74.75 37,68.25 37,68 36.88,67.88 | v35,69.75 35.25,69.75 | R13_10K.2 49.75,5.75 50,6 50,8.25 52.5,10.75 SV1.9 52.75,11 54,12.25 54,21.5 53.75,21.75 53.75,23.75 56,26 R1_1K.1 56.25,26.25 56.88,26.88 | 56.88,26.88 57,27 57,30.5 R20_330E.2 57.25,30.75 59.5,30.75 59.5,37 JP3.2 | v52.25,40.5 52.25,43.5 51.75,44 R38_1K.1 | 75.12,24.88 76.5,26.25 76.5,27.75 R16_300E.2 | 75.12,24.88 72.75,22.5 R15_10K.2 72.5,22.25 70.5,20.25 69.75,20.25 69.75,19.75 69,19 69,16.75 69.5,16.25 69.5,15.25 68.75,14.5 62.5,14.5 | 75.12,24.88 73.12,26.88 | 73.12,26.88 71.25,28.75 71.25,35 R21_1K.2 | 74.5,47.75 75.75,49 R17_10K.2 | 74.5,47.75 74.5,36 75.75,34.75 75.75,32.25 73.25,29.75 73.25,27 73.12,26.88 | 62.5,14.5 62.5,23 SV3.2 | 62.5,14.5 62.5,11 61,9.5 R14_300E.2
  Bottom 0.584: v45,23 v45,26 45,27.75 | 45,27.75 v45,31 | v44.75,27.75 45,27.75 | v57.5,26.25 56.88,26.88 | v74.25,47.75 74.5,47.75